# Altium PCB FAT42.PCBDOC
Units mm, origin at the board's own origin, x right, y up, seen from the top; angles counter-clockwise.
Board outline 152.4 x 101.6 mm, 2 copper layers (Top Layer, Bottom Layer); 72 components, 146 nets, 244 pads, 90 vias.
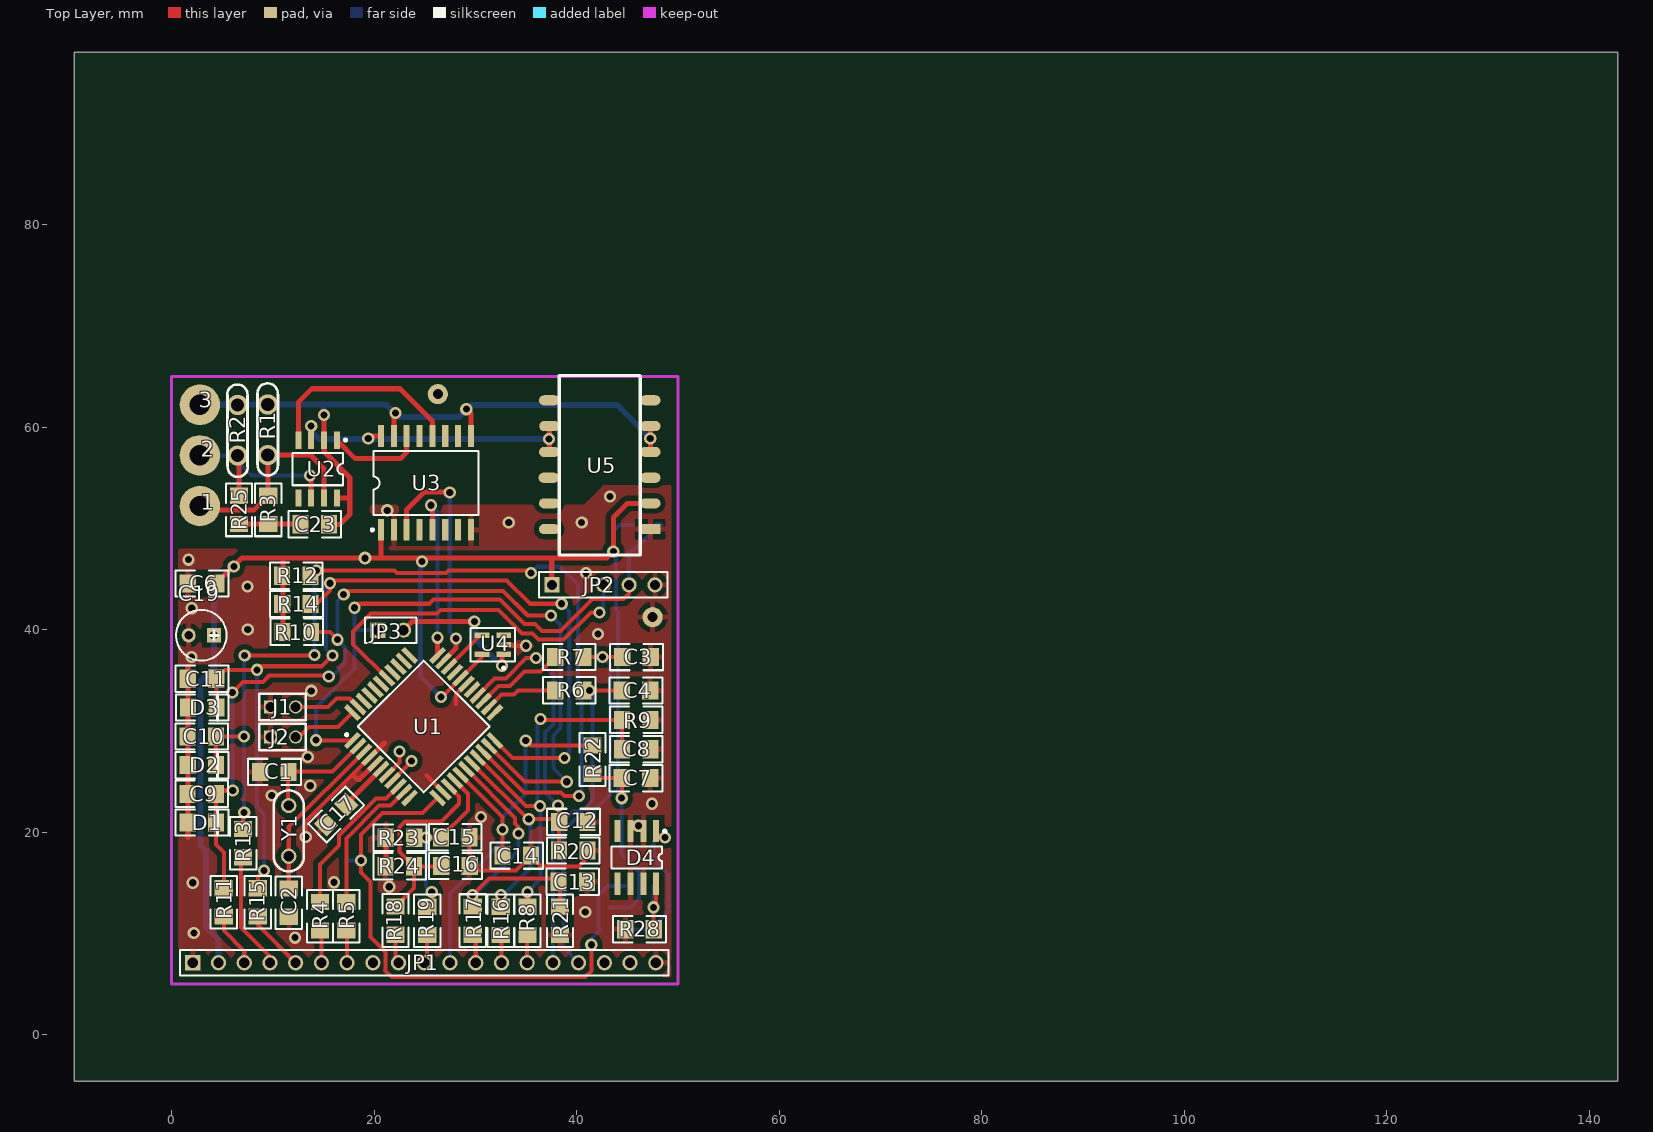
[diagram p0: Top Layer view]
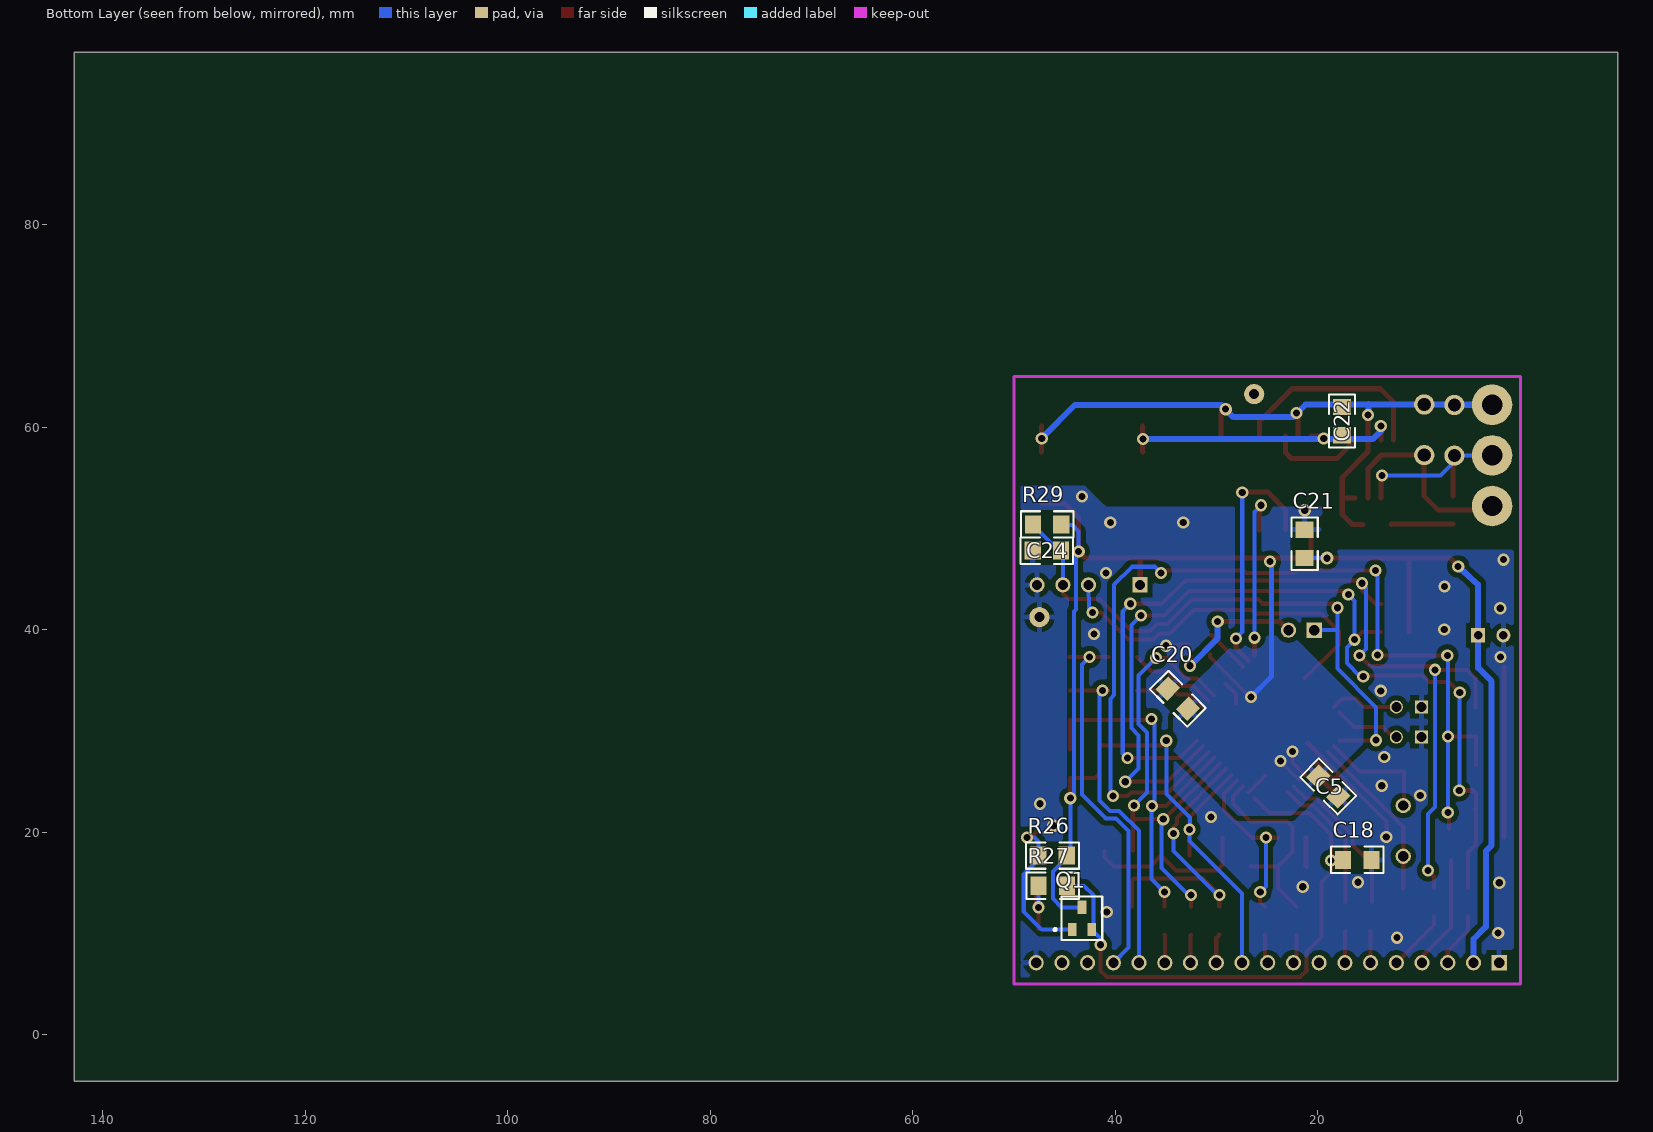
[diagram p1: Bottom Layer view, seen from below]

## Layer stack, top to bottom
Top Layer: signal copper 0.0356
Dielectric: dielectric 0.32, FR-4, Dk 4.8
Bottom Layer: signal copper 0.0356

## Board outline
-9.6,-4.6 142.8,-4.6 142.8,97 -9.6,97

## Design rules (kind name [scope] priority, off if disabled: settings)
Clearance POLY [InPoly] p1: gap=0.5
Clearance mega [InComponent(U1)] p2: gap=0.2
Clearance [All] p3: gap=0.3
ComponentClearance [All] p1: gap=0.01 collisioncheckmode=0
PolygonConnect [All] p1: connectstyle=Relief reliefconductorwidth=0.5 reliefentries=4 polygonreliefangle="90 Angle"
RoutingLayers [All] p1: top layer=Horizontal bottom layer=Vertical
RoutingVias [All] p1: holewidth=0.7 width=1.2 viastyle="Through Hole" minholewidth=0.6 minwidth=1.1 maxholewidth=0.85 maxwidth=1.5
SolderMaskExpansion [All] p1: expansion=0.102
TestPointUsage [All] p1: valid=0 allowmultiple=FALSE
Testpoint [All] p1: side=15 testpointundercomponent=TRUE minsize=1.016 maxsize=2.54 preferedsize=1.524 minholesize=0 maxholesize=1.016 preferedholesize=0.813 testpointgrid=0.025 style=1023 order=1234567890
Width [All] p1: maxlimit=2 minlimit=0.254 preferedwidth=0.254 toplayer_prefwidth=0.4 bottomlayer_prefwidth=0.4 minimp=50.000000 maximp=50.000000 favimp=50.000000
16 further rules are at their usual default settings.

## Components (designator, comment, footprint, x,y, rotation, side; value= is the part's Value field where it differs from the comment)
1 "" PIN2R#1 2.875,51.85 r0 top (schematic designator ?)
2 "" PIN2R#2 2.875,57.05 r0 top (schematic designator ?)
3 "" PIN2R#3 2.7,61.925 r0 top (schematic designator ?)
C1 "10pF" _1206#1 10.175,25.95 r0 top (schematic designator C?)
C2 "10pF" _1206#1 11.575,13.05 r90 top (schematic designator C?)
C3 "1pF" _1206#1 45.9,37.275 r180 top (schematic designator C?)
C4 "1pF" _1206#1 45.85,33.975 r180 top (schematic designator C?)
C5 "22.0" _1206#1 18.994,24.519 r45 bottom
C6 "1.0" _1206#1 3.025,44.55 r0 top
C7 "1.0" _1206#1 45.85,25.325 r180 top
C8 "1.0" _1206#1 45.875,28.175 r180 top (schematic designator C?)
C9 "1.0" _1206#1 3,23.782 r0 top
C10 "1.0" _1206#1 3,29.452 r0 top
C11 "1.0" _1206#1 3.025,35.147 r0 top
C12 "1.0" _1206#1 39.675,21 r180 top
C13 "1.0" _1206#1 39.6,15.1 r180 top
C14 "1.0" _1206#1 34.075,17.675 r180 top
C15 "1.0" _1206#1 28,19.475 r180 top
C16 "1.0" _1206#2 28.05,16.65 r180 top
C17 "1.0" _1206#2 16.25,21.725 r45 top
C18 "22.0" _1206#1 16.125,17.25 r0 bottom
C19 "22.0x50" el3 4.2,39.425 r180 top
C20 "22.0" _1206#1 33.85,33.175 r45 bottom
C21 "22.0" _1206#1 21.325,48.475 r90 bottom
C22 "22.0" _1206#1 17.625,60.6 r90 bottom
C23 "100n" _1206#1 14.15,50.4 r0 top
C24 "1.0" _1206#1 46.75,47.8 r180 bottom
D1 "C5v6" _1206d 3,20.935 r180 top
D2 "C5v6" _1206d 3,26.605 r180 top
D3 "C5v6" _1206d 3.025,32.3 r180 top
D4 "TL431ACD" SO-G8 45.95,17.5 r180 top
J1 "" jmp 9.75,32.375 r0 top
J2 "" jmp 9.75,29.4 r0 top
JP1 "PLSR19" HDR1X19 2.1,7.1 r0 top
JP2 "" HDR1X5_uart 37.575,44.425 r0 top
JP3 "PLS2" HDR1X2 20.375,39.925 r0 top
Q1 "BC847" SO-G3 43.3,11.475 r180 bottom
R1 "JVR07N" JVR07N 9.5,57.225 r90 top
R2 "JVR07N" JVR07N 6.525,62.175 r270 top
R3 "560R" _1206#1 9.55,51.8 r270 top
R4 "1K0" _1206#1 14.65,11.7 r90 top (schematic designator R31)
R5 "1K0" _1206#1 17.25,11.7 r90 top (schematic designator R30)
R6 "100R" _1206#1 39.3,34 r0 top (schematic designator R?)
R7 "100R" _1206#1 39.3,37.3 r0 top (schematic designator R?)
R8 "1R0" _1206#1 35.15,11.225 r270 top (schematic designator R?)
R9 "2K0" _1206#1 45.875,31.075 r180 top (schematic designator R?)
R10 "1K0" _1206#1 12.375,39.775 r0 top
R11 "100R" _1206#1 5.175,13.05 r270 top
R12 "1K0" _1206#1 12.325,45.325 r0 top
R13 "100R" _1206#1 7.075,18.9 r270 top
R14 "1K0" _1206#1 12.35,42.525 r0 top
R15 "100R" _1206#1 8.525,13.05 r270 top
R16 "33K" _1206#1 32.525,11.225 r270 top
R17 "33K" _1206#1 29.75,11.25 r270 top
R18 "100R" _1206#2 22.125,11.275 r270 top
R19 "33K" _1206#1 25.25,11.225 r270 top
R20 "2K0" _1206#1 39.65,18.175 r180 top
R21 "1K5" _1206#1 38.35,11.25 r90 top
R22 "2K0" _1206#1 41.575,27.15 r270 top
R23 "1K5" _1206#1 22.575,19.45 r0 top
R24 "100M" _1206#2 22.525,16.625 r0 top
R25 "560R" _1206#1 6.65,51.825 r90 top
R26 "1K0" _1206#1 46.225,17.675 r0 bottom
R27 "1K0" _1206#1 46.175,14.7 r180 bottom
R28 "1K8" _1206#1 46.225,10.425 r0 top
R29 "10K" _1206#1 46.75,50.375 r0 bottom
U1 "STM8S208S6" QFP10X10-G44/G10N 24.9,30.425 r45 top
U2 "TJA1050" SO-G8/D5 14.425,55.85 r180 top
U3 "ISO7231" SO-G16/D10.4 25.125,54.475 r0 top
U4 "TPS3823-50" SO-G5/P.95 31.725,38.5 r90 top
U5 "SBT01L-05" SBT01DET01 47.293,49.907 r90 top
Y1 "10MHz" QWARZ1 11.575,22.625 r270 top

## Footprints (in the part's own frame and the unit in brackets; to place one, negate y for a bottom-side part, rotate by r counter-clockwise, add the part's x,y. Pads: shape width x height; smd on the part's side, far side on the other; paste and mask are expansions set on the pad)
_1206#1 [mm]
  rect 1.6x1.8 smd: 1(-1.412,-0.007) 2(1.388,-0.007)
  silkscreen extent -2.61,-1.31 2.59,1.29
_1206#2 [mm]
  rect 1.6x1.8 smd: 1(-1.393,-0.003) 2(1.407,-0.003)
  silkscreen extent -2.59,-1.3 2.61,1.3
_1206d [mm]
  rect 1.6x1.8 smd: 1(1.395,-0.009) 2(-1.405,-0.009)
  silkscreen extent -2.6,-1.31 2.6,1.29
el3 [mm]
  rect 1.4x1.4 hole 0.85: 1(0.011,-0.008)
  round 1.4 hole 0.85: 2(2.511,-0.008)
  silkscreen extent -1.24,-2.51 3.76,2.49
HDR1X2 [mm]
  rect 1.5x1.5 hole 1: 1(-0.005,0.012)
  round 1.5 hole 1: 2(2.535,0.012)
  silkscreen extent -1.28,-1.26 3.8,1.28
HDR1X5_uart [mm]
  rect 1.5x1.5 hole 1: 1(-0.008,-0.009)
  round 1.5 hole 1: 3(5.072,-0.009) 4(7.612,-0.009) 5(10.152,-0.009)
  silkscreen extent -1.28,-1.28 11.42,1.26
HDR1X19 [mm]
  rect 1.5x1.5 hole 1: 1(0,0)
  round 1.5 hole 1: 2(2.54,0) 3(5.08,0) 4(7.62,0) 5(10.16,0) 6(12.7,0) 7(15.24,0) 8(17.78,0) 9(20.32,0) 10(22.86,0) 11(25.4,0) 12(27.94,0) 13(30.48,0) 14(33.02,0) 15(35.56,0) 16(38.1,0) 17(40.64,0) 18(43.18,0) 19(45.72,0)
  silkscreen extent -1.27,-1.27 46.99,1.27
jmp [mm]
  rect 1.3x1.3 hole 1: 1(0.008,-0.012)
  round 1.3 hole 1: 2(2.508,-0.012)
  silkscreen extent -1.09,-1.31 3.51,1.29
JVR07N [mm]
  round 2 hole 1.3: 1(0,0) 2(5,0)
  silkscreen extent -2.01,-1.02 7.09,1.02
PIN2R#1 [mm]
  round 4 hole 2: 1(-0.075,0.35)
PIN2R#2 [mm]
  round 4 hole 2: 1(-0.075,0.15)
PIN2R#3 [mm]
  round 4 hole 2: 1(0.1,0.275)
QFP10X10-G44/G10N [mm]
  rect 1.9x0.5 smd: 1(-5.95,4) 2(-5.95,3.2) 3(-5.95,2.4) 4(-5.95,1.6) 5(-5.95,0.8) 6(-5.95,0) 7(-5.95,-0.8) 8(-5.95,-1.6) 9(-5.95,-2.4) 10(-5.95,-3.2) 11(-5.95,-4) 23(5.95,-4) 24(5.95,-3.2) 25(5.95,-2.4) 26(5.95,-1.6) 27(5.95,-0.8) 28(5.95,0) 29(5.95,0.8) 30(5.95,1.6) 31(5.95,2.4) 32(5.95,3.2) 33(5.95,4)
  rect 0.5x1.9 smd: 12(-4,-5.95) 13(-3.2,-5.95) 14(-2.4,-5.95) 15(-1.6,-5.95) 16(-0.8,-5.95) 17(0,-5.95) 18(0.8,-5.95) 19(1.6,-5.95) 20(2.4,-5.95) 21(3.2,-5.95) 22(4,-5.95) 34(4,5.95) 35(3.2,5.95) 36(2.4,5.95) 37(1.6,5.95) 38(0.8,5.95) 39(0,5.95) 40(-0.8,5.95) 41(-1.6,5.95) 42(-2.4,5.95) 43(-3.2,5.95) 44(-4,5.95)
  silkscreen extent -6.07,-4.6 4.6,4.92
QWARZ1 [mm]
  round 1.5 hole 1: 1(0.008,0) 2(5.008,0)
  silkscreen extent -1.49,-1.5 6.51,1.5
SBT01DET01 [mm]
  rect 1x2 smd: 1(0.007,0.007)
  oval 1x2 smd: 2(2.557,0.007) 3(5.082,0.007) 4(7.632,0.007) 4(10.182,0.007) 5(7.632,10.007) 5(10.182,9.982) 6(5.082,10.057) 7(2.557,10.007) 8(0.007,10.007) 10(12.732,0.007) 11(12.732,10.007)
  silkscreen extent -2.54,1.01 15.16,9.01
SO-G3 [mm]
  rect 0.85x1.3 smd: 1(-0.948,-1.102) 2(0.952,-1.102) 3(0.002,1.098)
  silkscreen extent -2.77,-2.15 2,2.15
SO-G5/P.95 [mm]
  rect 0.55x1.45 smd: 1(-0.95,-1.075) 2(0,-1.075) 3(0.95,-1.075) 4(0.95,1.075) 5(-0.95,1.075)
  silkscreen extent -2.42,-2.2 1.65,2.2
SO-G8 [mm]
  rect 0.6x2.2 smd: 1(-1.905,-2.6) 2(-0.635,-2.6) 3(0.635,-2.6) 4(1.905,-2.6) 5(1.905,2.6) 6(0.635,2.6) 7(-0.635,2.6) 8(-1.905,2.6)
  silkscreen extent -2.88,-2.72 2.5,1.1
SO-G8/D5 [mm]
  rect 0.6x1.7 smd: 1(-1.905,-2.85) 2(-0.635,-2.85) 3(0.635,-2.85) 4(1.905,-2.85) 5(1.905,2.85) 6(0.635,2.85) 7(-0.635,2.85) 8(-1.905,2.85)
  silkscreen extent -2.88,-2.97 2.5,1.6
SO-G16/D10.4 [mm]
  rect 0.6x2.15 smd: 1(-4.445,-4.625) 2(-3.175,-4.625) 3(-1.905,-4.625) 4(-0.635,-4.625) 5(0.635,-4.625) 6(1.905,-4.625) 7(3.175,-4.625) 8(4.445,-4.625) 9(4.445,4.625) 10(3.175,4.625) 11(1.905,4.625) 12(0.635,4.625) 13(-0.635,4.625) 14(-1.905,4.625) 15(-3.175,4.625) 16(-4.445,4.625)
  silkscreen extent -5.42,-4.75 5.2,3.15

## Part data
1 2 3: library part Socket_Ring, "Socket"
C1 C2 C3 C4 C5 C6 C7 C8 C9 C10 C11 C12 C13 C14 C15 C16 C17 C18 C20 C21 C22 C23 C24: library part "Cap Semi", "Capacitor (Semiconductor SIM Model)"
C19: library part "Cap Pol1", "Polarized Capacitor (Radial)"
D1 D2 D3: library part Zener, "Default Diode"
D4: "Programmable Precision Reference"
J1 J2: library part JMP, "Switch"
JP1: library part "Header 30", "Header, 30-Pin"
JP2: library part SWIM_CONN
JP3: library part "Header 2", "Header, 2-Pin"
Q1: library part BC847ALT1, "General Purpose Transistor NPN Silicon"
R1 R2: library part "Res Varistor", "Varistor (Voltage-Sensitive Resistor)"
R3 R4 R5 R6 R7 R8 R9 R10 R11 R12 R13 R14 R15 R16 R17 R18 R19 R20 R21 R22 R23 R24 R25 R26 R27 R28 R29: library part Res2, "Resistor"
U4: library part TPS3823, "Reset IC"
U5: library part SBT01L
Y1: library part XTAL, "Crystal Oscillator"

## Free pads (board coordinates)
  round 2 hole 1: 0(26.3,63.25) 1(47.5,41.225)

## Via types
v1: diameter 1.2, hole 0.7, Top Layer to Bottom Layer, 88 vias
v2: diameter 1.27, hole 0.7, Top Layer to Bottom Layer, 1 vias
v3: diameter 1.27, hole 0.711, Top Layer to Bottom Layer, 1 vias

## Nets (pads, with @x,y where several pads share a name; then routed paths per layer and width w, separated by ;. In a path a pad name is that pad's centre, name@x,y a point inside that pad or via, vN(x,y) a via of type N, cw(c..) or ccw(c..) an arc to the next point about the centre after c; other vN are vias at no path point)
+5V: C5.2 C6.2 C7.2 C19.1 C20.1 C21.1 JP1.2 JP2.1 Q1.3 R10.1 R12.1 R14.1 R22.2 R26.1 R29.1 U1.7 U1.8 U1.29 U3.1 U4.5 U5.2 | length 177.3
  Top Layer w0.4: U1.7 22.5,26.894 v1(22.5,27.975) ; U1.8 23.7,26.962 v1(23.7,27.025) ; v1(26.6,33.35) 26.694,33.35 30.65,37.306 U4.5 ; R22.2 41.999,25.332 C7.2 v1@44.462,23.362
  Top Layer w0.5: C6.2 6.944,47.075 42.5,47.075 ; R10.1 11,39.806 11,47.075 ; 20.68,47.08 U3.1 ; JP2.1@37.542,45.066 37.542,47.058 ; 42.5,47.05 42.975,47.05 v1(43.625,47.7) 43.625,51.075 45.015,52.465 U5.2
  Bottom Layer w0.4: v3(19.1,47.05) 21.306,47.05 C21.1 ; Q1.3 45.123,12.573 45.125,12.575 45.3,12.575 46.175,13.45 46.175,16.125 44.813,17.487 44.45,17.85 v1(44.45,23.35) 44.1,23.7 44.1,41.775 43.9,41.975 43.9,47.1 43.625,47.375 43.625,49.7 44.232,50.306 R29.1@45.538,50.306
  Bottom Layer w0.5: v1@24.6,46.85 24.6,35.35 v1(26.6,33.35)
  Bottom Layer w0.6: JP1.2 4.64,9.435 3.425,10.65 3.425,18.125 2.85,18.7 2.85,34.875 4.189,36.214 4.189,44.439 v1(6.15,46.225)
  other v1: 24.75,46.725
+12V: 
AN0: 
AN1: 
AN2: 
AN3: 
BL0: 
BL1: 
C0: 
C1: 
C2: 
C3: 
C4: 
C5: 
C7: 
C8: 
CS: 
D2: 
D3: 
D4: 
D4: 
D4: 
D5: 
D6: 
D7: 
GND: C1.1 C2.1 C3.1 C4.1 C5.1 C6.1 C7.1 C8.1 C9.1 C10.1 C11.1 C12.1 C13.1 C14.1 C15.1 C16.1 C17.1 C18.1 C19.2 C20.2 C21.2 C24.1 D1.1 D2.1 D3.1 D4.2 D4.3 D4.6 D4.7 J1.1 J2.1 JP1.1 JP1.19 JP2.5 pad.1 R9.1 R20.1 R21.1 R23.1 R24.1 R28.1 U1.4 U1.5 U1.13 U1.28 U3.2 U3.8 U4.2 U5.1 | length 59
  Top Layer w0.4: v1(13.25,19.5) 13.25,21.038 U1.4 ; 25.175,25.6 26.82,23.955 U1.13 ; 28.1,32.65 28.1,33.625 U1.28 ; C15.1 29.412,16.738 29.95,16.2 34.006,16.2 C14.1 36.544,16.625 40.175,16.625 41.062,17.512 R20.1 ; U4.2 33.6,38.5 33.7,38.4 v1(35,38.4)
  Top Layer w0.5: 1.613,19.456 1.613,36.275 ; 17.9,25.675 18.377,25.198 18.541,25.198 U1.5 ; U1.4 21.012,28.8 21.025,28.8 ; R24.1 21.163,16.653 R23.1
  other v1: 12.2,9.575 2.2,10.025 40.85,12.1 21.5,14.6 2.1,15 16.05,15.05 30.575,21.5 47.45,22.8 9.9,23.625 13.7,24.575 13.45,27.4 13.8,33.95 1.975,37.3 42.1,39.575 7.525,40 2,42.1 7.5,44.25 40.925,45.6 1.675,46.9 33.3,50.575 40.5,50.575 21.3,51.775 43.3,53.125
  other v2: 46.1,20.625
ID0: JP1.3 R11.2 | length 5.4
  Top Layer w0.4: R11.2 5.168,10.282 7.18,8.27 JP1.3
ID0: 
ID1: JP1.4 R13.2 | length 11.3
  Top Layer w0.4: R13.2@6.85,17.194 6.85,10.6 9.72,7.73 JP1.4
ID2: JP1.5 R15.2 | length 6.1
  Top Layer w0.4: R15.2 8.518,10.807 12.225,7.1 JP1.5
IN0: JP1.14 R8.2 | length 2.7
  Top Layer w0.4: JP1.14 35.12,9.814 R8.2
IN1: JP1.13 R16.2 | length 2.8
  Top Layer w0.4: R16.2 32.58,9.776 JP1.13
IN2: JP1.12 R17.2 | length 2.9
  Top Layer w0.4: R17.2 30.04,9.566 JP1.12
IN3: C14.2 JP1.11 R22.1 U1.16 | length 41.5
  Top Layer w0.4: U1.16 32.687,21.506 C14.2 ; v1(34.975,29.025) 35.438,28.562 R22.1
  Bottom Layer w0.4: JP1.11 27.5,13.925 32.687,19.112 v1(32.687,20.25) 32.63,20.307 32.63,21.43 33.225,22.025 34.975,23.775 v1(34.975,29.025)
IN4: JP1.10 R19.2 | length 2.9
  Top Layer w0.4: JP1.10 25.243,7.383 R19.2
IN5: JP1.9 R18.2 | length 2.9
  Top Layer w0.4: R18.2 22.122,7.398 JP1.9
LED0: JP1.6 R4.1 | length 3.1
  Top Layer w0.4: JP1.6 14.8,10.2 R4.1@14.825,10.225
LED1: JP1.7 R5.1 | length 3.1
  Top Layer w0.4: JP1.7 R5.1@17.34,10.165
MISO: 
MOSI: 
Net1_1: 1.1 R1.1 R3.1 U2.7 | length 20.5
  Top Layer w0.5: 1.1 3.175,51.825 8.156,51.825 R3.1 9.543,57.182 R1.1 13.725,57.225 15.06,55.89 U2.7
Net2_1: 2.1 R2.2 R25.2 U2.6 | length 18.3
  Top Layer w0.5: R2.2 6.657,57.043 R25.2 ; v1(13.675,55.2) 13.79,55.085 U2.6
  Bottom Layer w0.4: 2.1 2.825,57.175 R2.2 6.525,56.575 7.9,55.2 v1(13.675,55.2)
Net3_1: 3.1 C22.2 C23.2 R1.2 R2.1 U2.2 U2.8 U3.9 U3.15 U5.4 | length 71.6
  Top Layer w0.5: v1@15.06,61.165 v1(15.05,61.175) 15.05,57.575 17.6,55.025 17.6,51.35 16.643,50.393 C23.2 ; U2.8 17.6,53 ; U3.15 21.95,61.225 v1(22.125,61.4) ; v1(29.11,61.76) 29.125,61.775 29.57,61.33 U3.9 ; v1(47.275,58.875) 47.275,60.08 47.285,60.069 U5.4@47.285,57.54
  Bottom Layer w0.6: 3.1 6.475,62.2 6.5,62.225 R1.2 14.975,62.225 14.987,62.237 15,62.25 15,61.225 v1(15.05,61.175) ; 15,62.225 21.2,62.225 22.45,60.975 28.35,60.975 29.55,62.175 44,62.175 47.275,58.9 v1(47.275,58.875) ; v1@29.11,61.735 v1(29.11,61.76)
NetC1_2: 
NetC2_2: 
NetC3_2: C3.2 JP1.16 R7.2 | length 38.3
  Top Layer w0.4: R7.2 44.501,37.293 C3.2
  Bottom Layer w0.4: JP1.16 38.7,8.6 38.7,20.1 39.95,21.35 40.95,21.35 42.825,23.225 ; 42.419,22.819 43.3,23.7 43.3,36.543 v1(42.55,37.293) v1@42.75,37.093
NetC3_2: 
NetC4_2: C4.2 JP1.15 R6.2 | length 33.2
  Top Layer w0.4: R6.2 44.451,33.993 C4.2 ; R6.2@41.25,33.993 v1(41.268,33.975)
  Bottom Layer w0.4: JP1.15 37.66,20.135 39.625,22.1 40.55,22.1 41.55,23.1 v1@41.55,33.993 ; v1@41.275,33.975 v1(41.268,33.975) v1@41.475,33.768
NetC4_2: 
NetC17_2: C17.2 U1.6 | length 4.9
  Top Layer w0.5: C17.2 17.247,22.772 U1.6
NetC21_2: 
NetC22_1: C22.1 U2.3 U3.16 U5.5 | length 30
  Top Layer w0.5: U2.3 v1(13.79,60.11) ; v1(19.425,58.875) 19.425,59.05 19.475,59.1 U3.16 ; U5.5@37.285,57.54 37.31,57.565 U5.5@37.31,60.09 ; v1(37.285,58.8) v1@37.31,58.825
  Bottom Layer w0.6: v1(13.79,60.11) 13.75,60.15 13.75,59.65 14.6,58.8 v1(37.285,58.8) ; v1(19.425,58.875) v1@19.425,58.925
NetC23_1: C23.1 R3.2 R25.1 | length 6.1
  Top Layer w0.5: R25.1 12.718,50.413 C23.1
NetC25_2: 
NetC26_2: 
NetD1_2: 
NetD2_1: 
NetD2_2: 
NetD3_2: 
NetD4_1: D4.1 Q1.1 R26.2 | length 15.5
  Top Layer w0.4: D4.1@47.825,19.95 47.85,19.95 48.325,19.475 v1(48.725,19.475)
  Bottom Layer w0.4: Q1.1 47.273,10.373 49.05,12.15 49.05,15.825 47.6,17.275 47.6,19.075 48,19.475 v1(48.725,19.475)
NetD4_8: D4.8 R27.1 R28.2 | length 6.7
  Top Layer w0.4: R28.2 47.613,12.562 v1(47.6,12.575) 47.6,12.8 47.855,13.055 D4.8
  Bottom Layer w0.4: R27.1 47.587,12.588 v1(47.6,12.575)
NetD14_2: 
NetJ1_2: J1.2 U1.43 | length 6.9
  Top Layer w0.4: J1.2 15.438,32.363 16.275,33.2 17.6,33.2 U1.43
NetJ2_2: J2.2 U1.44 | length 6.6
  Top Layer w0.4: J2.2 12.588,29.388 13.575,30.375 16.435,30.375 U1.44
NetJmp1_2: 
NetJmp2_2: 
NetJP1_5: 
NetJP1_6: 
NetJP1_7: 
NetJP1_8: 
NetJP1_15: 
NetJP1_16: 
NetJP1_17: 
NetJP1_17: 
NetJP1_25: 
NetJP1_27: 
NetJP1_28: 
NetJP3_2: JP3.2 U4.1 | length 14.1
  Top Layer w0.5: JP3.2 23.773,40.8 v1(29.9,40.8) ; v1(32.625,36.425) 32.625,37.375 U4.1
  Bottom Layer w0.6: v1(29.9,40.8) 29.9,39.125 32.575,36.45 32.6,36.45 v1(32.625,36.425)
NetQ1_1: 
NetQ2_1: 
NetQ2_3: 
NetR14_1: 
NetR15_1: 
NetR24_1: 
NetR30_2: 
NetR31_2: 
NetR34_1: 
NetR35_1: 
NetR36_1: 
NetR41_2: 
NetU1_11: 
NetU1_30: 
NetU2_1: U2.1 U3.14 | length 9.5
  Top Layer w0.5: U2.1 18.155,56.875 22.6,56.875 23.22,57.495 U3.14
NetU2_4: U2.4 U3.12 | length 20.3
  Top Layer w0.5: U2.4 12.52,62.445 13.85,63.775 22.55,63.775 25.76,60.565 U3.12
NetU3_4: 
NetU3_6: 
NetU3_7: 
PA1: C1.2 U1.2 Y1.1 | length 11.4
  Top Layer w0.4: Y1.1 11.493,22.699 11.493,25.962 15.912,25.962 U1.2
PA2: C2.2 U1.3 Y1.2 | length 16.6
  Top Layer w0.4: C2.2 11.575,14.444 11.575,20.494 U1.3
PA4: R4.2 U1.9 | length 15.2
  Top Layer w0.4: R4.2 14.657,16.787 16.557,18.687 16.557,19.672 20.21,23.325 21.194,23.325 U1.9
PA5: R5.2 U1.10 | length 13.9
  Top Layer w0.4: R5.2 17.257,19.382 20.5,22.625 21.626,22.625 U1.10
PB0: C9.2 D1.2 R10.2 R11.1 U1.21 | length 93
  Top Layer w0.4: 4.388,22.325 4.475,22.325 ; C9.2@4.405,23.758 C9.2 4.388,18.787 5.168,18.007 R11.1 ; v1(6,33.8) 6.025,33.8 7.05,34.825 9.025,34.825 9.65,35.45 15.45,35.45 v1(15.525,35.375) ; R10.2 15.632,39.768 v1(16.4,39) ; v1(17,43.45) 17.375,43.825 32.75,43.825 35.175,41.4 v1(37.475,41.4) ; U1.21 34.875,24.975 v1(39.025,24.975)
  Top Layer w0.5: C9.2 4.738,24.125 v1(6.05,24.125)
  Bottom Layer w0.4: v1(6,33.8) 6,33.55 6.009,33.8 6.012,33.9 v1@6.012,24.2 ; v1(15.525,35.375) 15.825,35.375 17.15,36.7 17.15,38.25 16.375,39.025 16.375,42.825 v1(17,43.45) ; v1(37.475,41.4) 38.425,40.45 38.425,30.275 37.7,29.55 37.7,26.3 v1(39.025,24.975)
PB1: C10.2 D2.2 R12.2 R13.1 U1.20 | length 97.6
  Top Layer w0.4: D2.2 4.405,29.428 C10.2 v1(7.145,29.445) ; R13.1 7.068,21.493 v1@7.175,21.6 ; v1(7.225,37.45) 14.075,37.45 v1(14.125,37.5) ; v1(14.325,45.825) 22.025,45.825 22.275,45.575 27.1,45.575 27.35,45.825 35.275,45.825 v1(35.5,45.6) ; U1.20 34.794,23.925 38.45,23.925 38.825,23.55 v1(40.25,23.55)
  Bottom Layer w0.4: v1@7.175,21.6 7.175,37.4 v1(7.225,37.45) ; v1(14.125,37.5) 14.125,45.625 v1(14.325,45.825) ; v1(35.5,45.6) 35.475,45.6 35.487,45.612 36.075,46.2 38.35,46.2 40.125,44.425 40.125,33.525 40.5,33.15 40.5,23.8 v1(40.25,23.55)
  other v1: 7.175,21.95
PB2: C8.2 R8.1 R9.2 U1.19 | length 38.4
  Top Layer w0.4: U1.19 35.013,22.575 v1(36.4,22.575) ; R8.1 35.143,14.068 v1(35.15,14.075) ; v1(36.45,31.175) 36.543,31.082 R9.2 C8.2
  Bottom Layer w0.4: v1(35.15,14.075) 35.175,14.075 36.45,15.35 v1@36.45,22.575 ; v1(36.4,22.575) 36.15,22.825 36.15,30.65 36.45,30.95 v1(36.45,31.175)
PB3: C12.2 R16.1 R20.2 U1.18 U1.26 | length 49
  Top Layer w0.4: U1.18 35.181,21.275 38.019,21.275 C12.2 ; U1.26 31.913,35.175 33.025,35.175 35.025,37.175 v1(35.975,37.175) ; R16.1 32.518,13.793 v1(32.525,13.8) ; v1(38.175,22.625) 38.287,22.513 C12.2 ; R20.2 38.262,20.982 C12.2
  Bottom Layer w0.4: v1(32.525,13.8) 32.775,13.8 35.45,16.475 35.45,21.1 v1(35.275,21.275) ; v1(35.975,37.175) 37.7,35.45 37.7,30.675 36.875,29.85 36.875,23.925 v1(38.175,22.625)
PB4: C13.2 R17.1 R21.2 U1.17 | length 29.7
  Top Layer w0.4: U1.17 33.925,21.4 33.925,20.85 34.25,20.525 v1(34.25,19.85) ; R17.1 29.743,13.768 v1(29.725,13.787) 31.363,15.425 38.194,15.425 38.262,15.357 38.357,15.262 R21.2
  Bottom Layer w0.4: v1(29.725,13.787) 29.912,13.787 34.25,18.125 v1(34.25,19.85)
PB6: C15.2 R19.1 R23.2 U1.15 | length 17.2
  Top Layer w0.4: R23.2 26.574,19.443 29.275,22.144 29.275,23.787 U1.15 ; v1@25.125,19.443 v1(25.125,19.475) ; R19.1 25.7,13.094 v1(25.7,14.075)
  Bottom Layer w0.4: v1(25.125,19.475) 25.125,14.65 v1(25.7,14.075)
PB7: C16.2 R18.1 R24.2 U1.14 | length 20.9
  Top Layer w0.4: R18.1 23.932,14.478 R24.2 ; C16.2 26.613,16.622 R24.2 ; U1.14 28.4,23.531 28.4,22.8 26.65,21.05 23.05,21.05 22.525,20.525 22.525,18.029 R24.2
PC1: R6.1 U1.24 | length 7.2
  Top Layer w0.4: U1.24 32.601,33.6 33.8,33.6 34.193,33.993 R6.1
PC2: R7.1 U1.25 | length 8.9
  Top Layer w0.4: U1.25 32.277,34.408 33.408,34.408 34.849,35.849 36.443,35.849 R7.1
PC3: 
PC5: U1.27
PC7: U1.31 U4.4 | length 4.5
  Top Layer w0.4: U1.31 30.531,39.45 U4.4
PD1: JP2.3 U1.38 | length 36.4
  Top Layer w0.4: U1.38 17.925,38.531 17.925,39.825 19.675,41.575 26.2,41.575 26.575,41.95 32.275,41.95 34.625,39.6 35.625,39.6 36.225,39 38.725,39 41.425,41.7 v1(42.25,41.7)
  Bottom Layer w0.4: v1(42.25,41.7) 42.622,42.072 JP2.3
PE6: C11.2 D3.2 R14.2 R15.1 U1.22 | length 95.4
  Top Layer w0.4: D3.2 4.43,35.123 C11.2 5.273,36 v1@8.425,36 ; v1(8.45,36.025) 8.8,36.375 14.825,36.375 v1(15.9,37.45) ; R15.1 8.518,15.618 v1(9.125,16.225) ; R14.2 14.293,42.518 15.65,43.875 v1(15.65,44.575) 15.925,44.85 33.1,44.85 35.4,42.55 v1(38.525,42.55) ; U1.22 33.682,27.3 v1(38.8,27.3)
  Bottom Layer w0.4: v1(8.45,36.025) 8.425,36 8.425,22.475 9.125,21.775 v1(9.125,16.225) ; v1(15.65,44.575) 15.25,44.175 15.25,38.1 v1(15.9,37.45) ; v1(38.525,42.55) 39.275,41.8 39.275,27.775 v1(38.8,27.3)
PG0: U1.32 U3.3 | length 24.4
  Top Layer w0.5: U3.3 23.22,51.845 24.95,53.575 27.425,53.575 v1(27.475,53.525) ; U1.32 28.1,38.15 v1(28.1,39.125)
  Bottom Layer w0.4: v1(27.475,53.525) 27.475,39.75 v1(28.1,39.125)
PG1: U1.33 U3.5 | length 17.6
  Top Layer w0.5: v1(25.625,52.275) 25.76,52.14 U3.5 ; U1.33 v1(26.279,39.196)
  Bottom Layer w0.4: v1(25.625,52.275) 26.279,51.621 v1(26.279,39.196)
PWMI: 
PWMU: 
PWMU: 
PWMU: 
RES: 
RST: C24.2 JP2.4 JP3.1 R29.2 U1.1 | length 59.2
  Top Layer w0.4: v1(14.25,29.075) 14.279,29.046 U1.1 ; v1(18.075,42.15) 18.475,42.55 25.475,42.55 25.875,42.95 32.45,42.95 34.85,40.55 35.9,40.55 36.405,40.045 36.6,39.85 38.4,39.85 41.55,43 44.625,43 45.162,43.537 JP2.4
  Bottom Layer w0.4: v1(14.25,29.075) 14.25,32.325 18.075,36.15 v1(18.075,42.15) ; 18.137,39.937 JP3.1 ; JP2.4 C24.2@45.187,47.637 ; C24.2@45.331,47.781 45.353,47.803 45.603,47.803 48.138,50.338 R29.2
  Bottom Layer w0.5: R29.2@47.882,50.382 R29.2 ; R29.2@48.138,50.306 R29.2@48.338,50.306
RX: 
RX: 
RX: 
RX: 
RX: 
RX: 
RXD: 
RXD: 
SCK: 
TX: 
TX: 
TX: 
TX: 
TX: 
TX: 
TX: 
TX: 
TX: 
TX: 
TX: 
TX: 
TXS: 
UREF: C18.2 Q1.2 R27.2 U1.12 | length 56.5
  Top Layer w0.4: 21.1,6.35 21.775,5.675 40.825,5.675 41.45,6.3 v1(41.45,8.875) ; 21.1,8.2 19.65,9.65 19.65,15.05 18.7,16 18.7,19.75 20.825,21.875 24.765,21.875 U1.12 ; 21.15,6.35 21.15,8.2
  Bottom Layer w0.4: C18.2 17.569,17.2 v1(18.7,17.2) ; v1(41.45,8.875) 41.45,9.474 Q1.2 42.175,10.546 42.175,13.775 43.093,14.693 R27.2
pads on no net: D4.4 D4.5 JP1.8 JP1.17 JP1.18 U1.11 U1.23 U1.30 U1.34 U1.35 U1.36 U1.37 U1.39 U1.40 U1.41 U1.42 U2.5 U3.4 U3.6 U3.7 U3.10 U3.11 U3.13 U4.3 U5.3 U5.6 U5.7 U5.8 U5.10 U5.11

## Polygon pours and split planes (outlines as drawn)
GND on Top Layer (hatched 90Degree grid 0.1 track 0.3, remove dead copper): -1.25,47.875 19.7,47.875 19.7,52.175 40.725,52.175 42.675,54.125 50.775,54.125 50.775,4.6 -1.9,4.6 -1.9,47.875
GND on Bottom Layer (hatched 90Degree grid 0.1 track 0.3, remove dead copper): -0.9,47.75 19.7,47.75 19.7,52.025 40.975,52.025 43.025,54.075 49.45,54.075 49.45,3.025 -1.275,3.025 -1.275,47.7 -0.7,47.7
+5V on Bottom Layer (hatched 90Degree grid 0.1 track 0.3, remove dead copper): 14.7,31.45 22.525,39.275 27.45,39.275 34.15,32.575 34.15,28.075 27.8,21.725 22.675,21.725 15.675,28.725 15.675,32.375 15.65,32.375

## Keep-outs
Keep-Out Layer:
  lines w0.3: 0,5 50,5 50,65 0,65 0,5

## Silkscreen, mask and mechanical layers (free items; w line width, h text height)
Mechanical 1:
  text "GND" at 2.375,-2.275 h1.52 r90
  text "GND" at 48.525,-2.35 h1.52 r90
  text "pwm1" at 40.7,-2.825 h1.52 r90
  text "canl" at 45.55,-2.825 h1.52 r90
  text "led1" at 18.175,-2.875 h1.52 r90
  text "adr1" at 10.4,-2.975 h1.52 r90
  text "led0" at 15.625,-3.15 h1.52 r90
  text "adr2" at 12.925,-3.25 h1.52 r90
  text "adr0" at 7.975,-3.3 h1.52 r90
  text "pwm0" at 38.175,-3.35 h1.52 r90
  text "canh" at 43.3,-3.35 h1.52 r90
  text "+12v" at 5.225,-3.575 h1.52 r90
  text "anin4" at 25.725,-4.45 h1.52 r90
  text "anin5" at 23.225,-4.5 h1.52 r90
  text "anin3" at 28.3,-4.5 h1.52 r90
  text "anin0" at 35.75,-4.5 h1.52 r90
  text "anin2" at 30.625,-4.55 h1.52 r90
  text "anin1(vent)" at 33.2,-12.475 h1.52 r90

## Dimensions
2.1,7.1 to 47.5,41.225 on Mechanical 1
47.82,7.1 to 47.5,41.225 on Mechanical 1
26.3,63.25 to 2.1,7.1 on Mechanical 1
2.1,7.1 to 26.3,63.25 on Mechanical 1
0,65 to 50,65 on Mechanical 1
0,5 to 0,65 on Mechanical 1